# EAGLE board 2021-03-01_HALO_Main_Board_LAYOUT (EAGLE 9.6.2)

Size 91.75 x 44.06 mm. Coordinates in mm from the lower left corner, seen from the top.
Outline: 0,0 91.75,0 91.75,44.06 0,44.06 0,0
Copper layers (1*16): Top 0.035559375mm / dielectric 1.6mm / Bottom 0.035559375mm
Design rules "jlcpcb2layer": minimum track width 5mil, minimum drill 12mil, track to track 5mil, track to pad 5mil, pad to pad 5mil, via to via 5mil, smd to smd 5mil, copper to edge 8mil, drill to drill 6mil, minimum pad ring 5mil, minimum via ring 3mil, stop-mask expansion 2.5mil, vias tented up to drill 0mil, thermal gap 10mil

## Footprints (pad centres in the part's own frame; a part is rotated, then mirrored left to right if it is on the bottom)
C0805 = smd 1.3 x 1.5: 1 -0.95,0; 2 0.95,0
TCP_ROM = smd 1.167 x 1.092: 1 -0.674,0; 2 0.674,0
EIA3216 = smd 1.4 x 1.6: + 1.4,0; - -1.4,0
C0805' = smd 1.3 x 1.5: 1 -0.85,0; 2 0.85,0
CHIP-LED0805 = smd 1.2 x 1.2: A 0,-1.05; C 0,1.05
3,0-PAD-SQUARE = drill 3 pad 5.842 square: B3,0 0,0
QFP50P1200X1200X120-64N = smd 1.475 x 0.3: 1 -5.738,3.75; 2 -5.738,3.25; 3 -5.738,2.75; 4 -5.738,2.25; 5 -5.738,1.75; 6 -5.738,1.25; 7 -5.738,0.75; 8 -5.738,0.25; 9 -5.738,-0.25; 10 -5.738,-0.75; 11 -5.738,-1.25; 12 -5.738,-1.75; 13 -5.738,-2.25; 14 -5.738,-2.75; 15 -5.738,-3.25; 16 -5.738,-3.75; 33 5.738,-3.75; 34 5.738,-3.25; 35 5.738,-2.75; 36 5.738,-2.25; 37 5.738,-1.75; 38 5.738,-1.25; 39 5.738,-0.75; 40 5.738,-0.25; 41 5.738,0.25; 42 5.738,0.75; 43 5.738,1.25; 44 5.738,1.75; 45 5.738,2.25; 46 5.738,2.75; 47 5.738,3.25; 48 5.738,3.75 | smd 0.3 x 1.475: 17 -3.75,-5.738; 18 -3.25,-5.738; 19 -2.75,-5.738; 20 -2.25,-5.738; 21 -1.75,-5.738; 22 -1.25,-5.738; 23 -0.75,-5.738; 24 -0.25,-5.738; 25 0.25,-5.738; 26 0.75,-5.738; 27 1.25,-5.738; 28 1.75,-5.738; 29 2.25,-5.738; 30 2.75,-5.738; 31 3.25,-5.738; 32 3.75,-5.738; 49 3.75,5.738; 50 3.25,5.738; 51 2.75,5.738; 52 2.25,5.738; 53 1.75,5.738; 54 1.25,5.738; 55 0.75,5.738; 56 0.25,5.738; 57 -0.25,5.738; 58 -0.75,5.738; 59 -1.25,5.738; 60 -1.75,5.738; 61 -2.25,5.738; 62 -2.75,5.738; 63 -3.25,5.738; 64 -3.75,5.738
1X05 = drill 1.016 pad 1.88: 1 0,0; 2 2.54,0; 3 5.08,0; 4 7.62,0; 5 10.16,0
1X06 = drill 1.016 pad 1.88: 1 0,0; 2 2.54,0; 3 5.08,0; 4 7.62,0; 5 10.16,0; 6 12.7,0
1X03_LOCK = drill 1.016 pad 1.88: 1 0,0.127; 2 2.54,-0.127; 3 5.08,0.127
1X02 = drill 1.016 pad 1.88: 1 0,0; 2 2.54,0
MICRO_USB = smd 1.38 x 0.45: 1 2.66,1.3; 2 2.66,0.65; 3 2.66,0; 4 2.66,-0.65; 5 2.66,-1.3 | smd 2.1 x 1.475: P1 2.3,-2.462; P2 2.3,2.462 | smd 1.9 x 2.375: P3 0,2.913; P4 0,-2.913 | smd 1.9 x 1.175: P5 0,0.838; P6 0,-0.838
1X04 = drill 1.016 pad 1.88: 1 0,0; 2 2.54,0; 3 5.08,0; 4 7.62,0
MICRO-SD-SOCKET = smd 1.8 x 1.4: CD1 -2.05,0.4; CD2 -7.75,0.4 | smd 0.8 x 1.5: CS -7.84,10.3; DI -6.74,10.7; DO -2.34,10.7; GND -3.44,10.9; RSV1 -8.94,10.7; RSV2 -1.24,10.7; SCLK -4.54,10.7; VCC -5.64,10.9 | smd 1.4 x 1.9: GND1 -13.6,14.55; GND3 -0.45,13.55
SMT-JUMPER_2_NO_NO-SILK = smd 0.635 x 1.27: 1 -0.406,0; 2 0.406,0
R0805 = smd 1.3 x 1.5: 1 -0.95,0; 2 0.95,0
TACTILE_SWITCH_TALL = smd 1.55 x 1.3: A1 -3.975,-2.25; A2 3.975,-2.25; B1 -3.975,2.25; B2 3.975,2.25
SOT360-1_NXP = smd 1.473 x 0.356: 1 -2.921,2.925; 2 -2.921,2.275; 3 -2.921,1.625; 4 -2.921,0.975; 5 -2.921,0.325; 6 -2.921,-0.325; 7 -2.921,-0.975; 8 -2.921,-1.625; 9 -2.921,-2.275; 10 -2.921,-2.925; 11 2.921,-2.925; 12 2.921,-2.275; 13 2.921,-1.625; 14 2.921,-0.975; 15 2.921,-0.325; 16 2.921,0.325; 17 2.921,0.975; 18 2.921,1.625; 19 2.921,2.275; 20 2.921,2.925
PW14 = smd 1.676 x 0.356: 1 -2.819,1.95; 2 -2.819,1.3; 3 -2.819,0.65; 4 -2.819,0; 5 -2.819,-0.65; 6 -2.819,-1.3; 7 -2.819,-1.95; 8 2.819,-1.95; 9 2.819,-1.3; 10 2.819,-0.65; 11 2.819,0; 12 2.819,0.65; 13 2.819,1.3; 14 2.819,1.95
SON_B1-APUR_STM = smd 0.813 x 0.254: 1 -1.473,1; 2 -1.473,0.5; 3 -1.473,0; 4 -1.473,-0.5; 5 -1.473,-1; 6 1.473,-1; 7 1.473,-0.5; 8 1.473,0; 9 1.473,0.5; 10 1.473,1 | smd 1.753 x 2.489: 11 0,0
SOT-23-5_MC_MCH = smd 1.321 x 0.508: 1 -1.295,0.95; 2 -1.295,0; 3 -1.295,-0.95; 4 1.295,-0.95; 5 1.295,0.95
PQFN50P300X300X100-16N = smd 0.53 x 0.35: 1 -1.22,1; 2 -1.22,0.5; 3 -1.22,0; 4 -1.22,-0.5; 5 -1.22,-1; 9 1.22,-1; 10 1.22,-0.5; 11 1.22,0; 12 1.22,0.5; 13 1.22,1 | smd 0.35 x 0.53: 6 -0.5,-1.22; 7 0,-1.22; 8 0.5,-1.22; 14 0.5,1.22; 15 0,1.22; 16 -0.5,1.22
IND_4028_TDK = smd 1.6 x 3.9: 1 -1.45,0; 2 1.45,0
ECX-32 = smd 1.3 x 1.1: 1 -1.15,-0.9; 2 1.15,-0.9; 3 1.15,0.9; 4 -1.15,0.9

## Placement (x,y rotation side)
C1  0.1uF  [C0805]  29.84,38.86 90 bottom
C2  0.1uF  [C0805]  46.23,27.81 225 bottom
C3  0.1uF  [C0805]  43.69,30.35 315 bottom
C4  0.1uF  [C0805]  39.88,26.54 315 bottom
C5  0.1uF  [C0805]  42.42,24 225 bottom
C6  0.1uF  [C0805]  44.96,25.27 225 bottom
C7  4.7uF  [C0805]  31.75,4.45 0 top
C8  4.7uF  [C0805]  29.59,8.26 90 bottom
C9  10uF  [C0805]  22.48,7.75 270 top
C10  22uF  [C0805]  22.35,2.79 90 top
C11  TCP1A106M8R  [TCP_ROM]  53.47,24.51 45 top
C12  0.1uF  [C0805]  48.39,1.4 180 top
C13  10uF  [EIA3216]  44.32,2.79 270 top
C14  30pF  [C0805']  35.31,15.75 180 top
C15  30pF  [C0805']  32.51,19.81 270 top
D1  CHIP-LED0805  [CHIP-LED0805]  78.36,14.73 270 top
D2  CHIP-LED0805  [CHIP-LED0805]  78.36,12.83 270 top
D3  CHIP-LED0805  [CHIP-LED0805]  78.36,10.92 270 top
D4  CHIP-LED0805  [CHIP-LED0805]  78.36,9.02 270 top
D5  CHIP-LED0805  [CHIP-LED0805]  78.36,7.11 270 top
D6  CHIP-LED0805  [CHIP-LED0805]  78.36,5.21 270 top
D7  CHIP-LED0805  [CHIP-LED0805]  78.36,3.3 270 top
D8  CHIP-LED0805  [CHIP-LED0805]  78.36,1.4 270 top
D9  CHIP-LED0805  [CHIP-LED0805]  31.75,2.29 270 top
H1  MOUNT-PAD-SQUARE3.0  [3,0-PAD-SQUARE]  4.06,39.88 0 bottom
H2  MOUNT-PAD-SQUARE3.0  [3,0-PAD-SQUARE]  87.12,40.26 0 bottom
H3  MOUNT-PAD-SQUARE3.0  [3,0-PAD-SQUARE]  4.06,4.06 0 bottom
H4  MOUNT-PAD-SQUARE3.0  [3,0-PAD-SQUARE]  87,4.32 0 bottom
IC1  DSPIC33EP512GM706-I_PT  [QFP50P1200X1200X120-64N]  43.69,26.54 225 top
J1  I2C1  [1X05]  59.94,36.2 0 top
J2  MUX1_I2C0  [1X05]  1.52,24.13 90 top
J4  SPI1  [1X06]  67.82,41.27 0 top
J5  MUX1_I2C1  [1X05]  8.89,24.13 90 top
J6  MUX1_I2C2  [1X05]  1.52,10.16 90 top
J7  MUX1_I2C3  [1X05]  8.89,10.16 90 top
J8  MUX2_I2C0  [1X05]  90.04,24.26 90 top
J9  MUX2_I2C1  [1X05]  82.42,24.26 90 top
J10  MUX2_I2C2  [1X05]  90.04,10.29 90 top
J11  MUX2_I2C3  [1X05]  82.42,10.29 90 top
J12  ICSP  [1X05]  47.88,41.4 180 top
J13  RGB_LED  [1X03_LOCK]  56.37,1.8 90 top
J14  UART1  [1X06]  51.82,41.27 0 top
J15  USB  [1X02]  38.73,1.52 90 top
J16  BATTERY  [1X02]  25.4,6.35 90 top
J17  47346-0001  [MICRO_USB]  31.75,2.54 90 bottom
J18  RGB_LED  [1X03_LOCK]  59.87,15.84 270 top
J19  VREG  [1X02]  12.7,1.52 90 top
J20  [1X04]  67.06,14.86 270 top
J21  [1X04]  70.23,9.27 270 top
J22  RGB_LED  [1X03_LOCK]  59.87,6.84 270 top
J23  RGB_LED  [1X03_LOCK]  63.35,15.84 270 top
J24  RGB_LED  [1X03_LOCK]  63.35,6.84 270 top
J25  RGB_LED  [1X03_LOCK]  56.4,15.84 270 top
J26  MICRO-SD_CARD_SOCKET  [MICRO-SD-SOCKET]  26.29,28.19 0 top
JP1  JUMPER-SMT_2_NO_NO-SILK  [SMT-JUMPER_2_NO_NO-SILK]  20.57,35.69 180 bottom
JP2  JUMPER-SMT_2_NO_NO-SILK  [SMT-JUMPER_2_NO_NO-SILK]  18.92,37.21 180 bottom
JP3  JUMPER-SMT_2_NO_NO-SILK  [SMT-JUMPER_2_NO_NO-SILK]  20.57,38.73 180 bottom
JP4  JUMPER-SMT_2_NO_NO-SILK  [SMT-JUMPER_2_NO_NO-SILK]  18.92,40.13 180 bottom
JP5  JUMPER-SMT_2_NO_NO-SILK  [SMT-JUMPER_2_NO_NO-SILK]  20.57,41.66 180 bottom
R1  470  [R0805]  31.75,33.91 90 bottom
R2  10.0k  [R0805]  33.66,38.73 270 bottom
R3  DNP  [R0805]  18.03,30.48 270 bottom
R4  DNP  [R0805]  18.03,26.42 90 bottom
R5  DNP  [R0805]  20.32,30.48 270 bottom
R6  DNP  [R0805]  20.32,26.42 90 bottom
R7  DNP  [R0805]  22.61,30.48 270 bottom
R8  DNP  [R0805]  22.61,26.42 90 bottom
R9  DNP  [R0805]  58.8,22.61 180 bottom
R10  DNP  [R0805]  62.99,22.61 0 bottom
R11  DNP  [R0805]  58.8,25.15 180 bottom
R12  DNP  [R0805]  62.99,25.15 0 bottom
R13  DNP  [R0805]  58.8,27.69 180 bottom
R14  DNP  [R0805]  62.99,27.69 0 bottom
R15  DNP  [R0805]  44.7,7.49 270 bottom
R16  DNP  [R0805]  44.7,3.43 90 bottom
R17  1.00k  [R0805]  73.79,18.54 0 bottom
R18  1.00k  [R0805]  73.79,16.13 0 bottom
R19  1.00k  [R0805]  73.79,13.72 0 bottom
R20  1.00k  [R0805]  73.79,11.3 0 bottom
R21  1.00k  [R0805]  73.79,8.89 0 bottom
R22  1.00k  [R0805]  73.79,6.48 0 bottom
R23  1.00k  [R0805]  73.79,4.06 0 bottom
R24  1.00k  [R0805]  73.79,1.65 0 bottom
R27  2.2k  [R0805]  67.56,32.51 90 top
R28  2.2k  [R0805]  70.1,32.51 90 top
R29  2.2k  [R0805]  5.08,31.75 0 bottom
R30  2.2k  [R0805]  5.08,34.29 0 bottom
R31  2.2k  [R0805]  12.57,31.62 0 bottom
R32  2.2k  [R0805]  12.7,34.29 0 bottom
R33  2.2k  [R0805]  5.08,17.78 0 bottom
R34  2.2k  [R0805]  5.08,20.32 0 bottom
R35  2.2k  [R0805]  12.7,17.78 0 bottom
R36  2.2k  [R0805]  12.7,20.32 0 bottom
R37  2.2k  [R0805]  86.23,31.88 180 bottom
R38  2.2k  [R0805]  86.23,34.42 180 bottom
R39  2.2k  [R0805]  78.61,31.88 180 bottom
R40  2.2k  [R0805]  78.61,34.42 180 bottom
R41  2.2k  [R0805]  86.23,17.91 180 bottom
R42  2.2k  [R0805]  86.23,20.45 180 bottom
R43  2.2k  [R0805]  78.61,17.91 180 bottom
R44  2.2k  [R0805]  78.61,20.45 180 bottom
R45  470  [R0805]  35.05,3.43 90 top
R46  2.00k  [R0805]  35.94,7.87 270 top
R47  27.0  [R0805]  37.97,8.26 90 bottom
R48  27.0  [R0805]  33.15,8.26 90 bottom
R49  560k  [R0805]  19.05,1.65 0 top
R50  100k  [R0805]  19.05,3.81 180 top
R57  DNP  [R0805]  17.91,3.43 90 bottom
R58  DNP  [R0805]  17.91,7.49 270 bottom
R59  DNP  [R0805]  20.19,3.43 90 bottom
R60  DNP  [R0805]  20.19,7.49 270 bottom
R61  10k  [R0805]  5.08,29.21 0 bottom
R62  10k  [R0805]  12.7,29.21 0 bottom
R63  10k  [R0805]  5.08,15.24 0 bottom
R64  10k  [R0805]  12.7,15.24 0 bottom
R65  10k  [R0805]  86.23,29.34 180 bottom
R66  10k  [R0805]  78.61,29.34 180 bottom
R67  10k  [R0805]  86.23,15.37 180 bottom
R68  10k  [R0805]  78.61,15.37 180 bottom
R69  10k  [R0805]  47.88,8.51 0 bottom
R70  1M  [R0805]  30.73,16.38 315 top
S1  SWITCH-MOMENTARY-2SMD-4  [TACTILE_SWITCH_TALL]  31.75,36.45 270 top
U1  PCA9544APW  [SOT360-1_NXP]  20.57,19.18 180 bottom
U2  PCA9544APW  [SOT360-1_NXP]  70.36,25.15 90 bottom
U3  TXB0104PWR  [PW14]  19.68,38.61 180 bottom
U4  STBB1-APUR  [SON_B1-APUR_STM]  19.05,7.62 180 top
U5  MCP73831T-2ACI/OT  [SOT-23-5_MC_MCH]  31.75,7.62 270 top
U8  H3LIS200DLTR  [PQFN50P300X300X100-16N]  48.01,5.71 180 top
U$1  2.2uH  [IND_4028_TDK]  13.59,9.02 90 top
U$3  ECS-240-20-33-TR  [ECX-32]  35.69,19.81 90 top

## Library data of the parts
C1-C10 C12 R1-R24 R27-R50 R57-R70 = rcl
C11 = HALO_Tant_Cap_Library; BUILT_BY: EMA_UL_Team; MANUFACTURER_PART_NUMBER: TCP1A106M8R; SOURCELIBRARY: Rohm_2014-12-31; VENDOR: ROHM Semiconductor
C13 = SparkFun-Capacitors; PROD_ID: CAP-00811
C14 C15 = adafruit
D1-D9 = UA_NASA_RMC-Diodes
H1-H4 = holes
IC1 = SamacSys_Parts; ARROW_PART_NUMBER: DSPIC33EP512GM706-I/PT; ARROW_PRICE-STOCK: https://www.arrow.com/en/products/dspic33ep512gm706-ipt/microchip-technology; DESCRIPTION: Microchip DSPIC33EP512GM706-I/PT, 16bit dsPIC Microcontroller, 60MHz, 512 kB Flash, 64-Pin TQFP; HEIGHT: 1.2mm; MANUFACTURER_NAME: Microchip; MANUFACTURER_PART_NUMBER: DSPIC33EP512GM706-I/PT; MOUSER_PART_NUMBER: 579-512GM706-I/PT; MOUSER_PRICE-STOCK: https://www.mouser.com/Search/Refine.aspx?Keyword=579-512GM706-I%2FPT
J1 J2 J5-J13 J15 J16 J18 J19 J22-J25 = SparkFun-Connectors
J4 J14 = SparkFun-Connectors; PROD_ID: CONN-08437
J17 = tinycircuits; PARTNO: AS-ITM-00021; PNPROTATION: 90
J20 J21 = SparkFun-Connectors; PROD_ID: CONN-09696
J26 = SparkFun-Connectors; PROD_ID: CONN-07820; SF_ID: PRT-00127
JP1-JP5 = SparkFun-Jumpers
S1 = UA_NASA_RMC-Switches; PROD_ID: SWCH-11966
U1 U2 = I2C_Multiplexer; BUILT_BY: EMA_UL_Team; MANUFACTURER_PART_NUMBER: PCA9544APW; SOURCELIBRARY: NXP_2011-11-10; VENDOR: NXP
U3 = Level_Shifter_TXB0104PWR; DATASHEET_URL: http://www.ti.com/lit/gpn/TXB0104; DESCRIPTION: 4-Bit Bidirectional Voltage-Level Translator with Auto Direction Sensing and +/-15 kV ESD Protect; FAMILY_NAME: AUTO DIRECTION SENSING DUAL SUPPLY TRANSLATOR; GENERIC_PART_NUMBER: TXB0104; INDUSTRY_STD_PKG_TYPE: TSSOP; MANUFACTURER: Texas Instruments; MANUFACTURER_PART_NUMBER: TXB0104PWR; PACKAGE_DESIGNATOR: PW; PIN_COUNT: 14; VENDOR: Texas Instruments
U4 = HALO_Buck_Boost; BUILT_BY: EMA_Matt; DATASHEET: https://datasheet.octopart.com/STBB1-APUR-STMicroelectronics-datasheet-10837531.pdf; MANUFACTURER_PART_NUMBER: STBB1-APUR; SOURCELIBRARY: Updates_to_database_2020-11-13; VENDOR: STMicroelectronics
U5 = HALO_Batt_Charger; BUILT_BY: EMA_UL_Team; MANUFACTURER_PART_NUMBER: MCP73831T-2ACI/OT; SOURCELIBRARY: Microchip_2011-05-13; VENDOR: Microchip
U8 = H3LIS200DLTR; DESCRIPTION: Accelerometer X, Y, Z Axis ±100g, ±200g 25Hz ~ 500Hz 16-TFLGA (3x3); DIGI-KEY_PART_NUMBER: 497-15698-1-ND; MF: STMicroelectronics; MP: H3LIS200DLTR; PACKAGE: TFLGA-16 STMicroelectronics; PURCHASE-URL: https://pricing.snapeda.com/search/part/H3LIS200DLTR/?ref=eda
U$1 = HALO_L_Buck_Boost
U$3 = UA_NASA_RMC-Oscillators

## Nets
!MCLR: IC1.7 J12.1 R1.1
!MUX1_INT0: J2.3 R61.2 U1.4
!MUX1_INT1: J5.3 R62.2 U1.7
!MUX1_INT2: J6.3 R63.2 U1.11
!MUX1_INT3: J7.3 R64.2 U1.14
!MUX2_INT0: J8.3 R65.2 U2.4
!MUX2_INT1: J9.3 R66.2 U2.7
!MUX2_INT2: J10.3 R67.2 U2.11
!MUX2_INT3: J11.3 R68.2 U2.14 U8.11
!RGB1_EN: IC1.4 J25.1
!RGB2_EN: IC1.5 J25.2
!RGB3_EN: IC1.6 J25.3
!SS: IC1.15 J4.3 JP1.2 U3.13
!U1RTS: IC1.23 J14.6
+3V3: C2.1 C3.1 C4.1 C5.1 C6.1 C10.1 C12.1 C13.+ IC1.10 IC1.19 IC1.26 IC1.38 IC1.57 J1.1 J2.1 J4.1 J5.1 J6.1 J7.1 J8.1 J9.1 J10.1 J11.1 J12.2 J13.2 J14.3 J19.2 J26.VCC R2.1 R3.1 R5.1 R7.1 R9.1 R11.1 R13.1 R15.1 R27.1 R28.1 R29.1 R30.1 R31.1 R32.1 R33.1 R34.1 R35.1 R36.1 R37.1 R38.1 R39.1 R40.1 R41.1 R42.1 R43.1 R44.1 R49.2 R61.1 R62.1 R63.1 R64.1 R65.1 R66.1 R67.1 R68.1 R69.2 U1.20 U2.20 U3.1 U3.14 U4.1 U8.1 U8.14 U8.15
ACCEL_A0: R15.2 R16.2 U8.7
ACCEL_INT2: U8.9
BB_EN: R57.2 R58.2 U4.6
BB_M/S: R59.2 R60.2 U4.7
CD: IC1.16 JP5.2 U3.9
GND: C1.2 C2.2 C3.2 C4.2 C5.2 C6.2 C7.2 C8.2 C9.2 C10.2 C11.2 C12.2 C13.- C14.2 C15.2 D1.C D2.C D3.C D4.C D5.C D6.C D7.C D8.C H1.B3,0 H2.B3,0 H3.B3,0 H4.B3,0 IC1.9 IC1.20 IC1.25 IC1.41 J1.2 J2.2 J4.2 J5.2 J6.2 J7.2 J8.2 J9.2 J10.2 J11.2 J12.3 J13.1 J14.1 J15.1 J16.1 J17.5 J17.P1 J17.P2 J17.P3 J17.P4 J17.P5 J17.P6 J19.1 J26.GND J26.GND1 J26.GND3 R4.1 R6.1 R8.1 R10.1 R12.1 R14.1 R16.1 R46.1 R50.1 R58.1 R60.1 S1.A2 U1.10 U2.10 U3.7 U4.3 U4.9 U4.11 U5.2 U8.5 U8.10 U8.12 U8.13 U8.16 U$3.2 U$3.4
I2C_MUX1_A0: R3.2 R4.2 U1.1
I2C_MUX1_A1: R5.2 R6.2 U1.2
I2C_MUX1_A2: R7.2 R8.2 U1.3
I2C_MUX2_A0: R9.2 R10.2 U2.1
I2C_MUX2_A1: R11.2 R12.2 U2.2
I2C_MUX2_A2: R13.2 R14.2 U2.3
INT: J1.3
LED1: IC1.42 J20.1 R17.2
LED2: IC1.43 J20.2 R18.2
LED3: IC1.44 J20.3 R19.2
LED4: IC1.49 J20.4 R20.2
LED5: IC1.53 J21.1 R21.2
LED6: IC1.54 J21.2 R22.2
LED7: IC1.58 J21.3 R23.2
LED8: IC1.59 J21.4 R24.2
MISO: IC1.34 J4.6 JP4.2 U3.10
MOSI: IC1.33 J4.5 JP3.2 U3.11
MUX1_SC0: J2.5 R30.2 U1.6
MUX1_SC1: J5.5 R32.2 U1.9
MUX1_SC2: J6.5 R34.2 U1.13
MUX1_SC3: J7.5 R36.2 U1.16
MUX1_SD0: J2.4 R29.2 U1.5
MUX1_SD1: J5.4 R31.2 U1.8
MUX1_SD2: J6.4 R33.2 U1.12
MUX1_SD3: J7.4 R35.2 U1.15
MUX2_SC0: J8.5 R38.2 U2.6
MUX2_SC1: J9.5 R40.2 U2.9
MUX2_SC2: J10.5 R42.2 U2.13
MUX2_SC3: J11.5 R44.2 U2.16 U8.4
MUX2_SD0: J8.4 R37.2 U2.5
MUX2_SD1: J9.4 R39.2 U2.8
MUX2_SD2: J10.4 R41.2 U2.12
MUX2_SD3: J11.4 R43.2 U2.15 U8.6
N$1: C1.1 R1.2 R2.2 S1.B2
N$2: R69.1 U8.8
N$5: D1.A R17.1
N$6: J17.2 R47.1
N$7: D2.A R18.1
N$8: D9.C R45.1
N$9: R49.1 R50.2 U4.10
N$10: D3.A R19.1
N$11: D4.A R20.1
N$12: D5.A R21.1
N$13: D6.A R22.1
N$14: D7.A R23.1
N$15: D8.A R24.1
N$16: R45.2 U5.1
N$17: J17.3 R48.1
N$18: U4.4 U$1.2
N$19: R46.2 U5.5
N$20: U4.2 U$1.1
N$25: U2.17
OSC1: C15.1 IC1.39 R70.1 U$3.3
OSC2: C14.1 IC1.40 R70.2 U$3.1
PGEC1: IC1.17 J12.5
PGED1: IC1.18 J12.4
PWM1H: IC1.2 J23.1
PWM1L: IC1.3 J18.1
PWM2H: IC1.62 J23.2
PWM2L: IC1.63 J18.2
PWM3H: IC1.60 J23.3
PWM3L: IC1.61 J18.3
PWM4H: IC1.64 J24.1
PWM4L: IC1.1 J22.1
PWM5H: IC1.52 J24.2
PWM5L: IC1.55 J22.2
PWM6H: IC1.50 J24.3
PWM6L: IC1.51 J22.3
RGB_DIN: IC1.11 J13.3
SCK: IC1.35 J4.4 JP2.2 U3.12
SCL1: IC1.37 J1.5 R28.2 U1.18 U2.18
SD_!SS: J26.CS JP1.1 U3.2
SD_CD: J26.CD1 JP5.1 U3.6
SD_MISO: J26.DO JP4.1 U3.5
SD_MOSI: J26.DI JP3.1 U3.4
SD_SCK: J26.SCLK JP2.1 U3.3
SDA1: IC1.36 J1.4 R27.2 U1.19 U2.19
U1CTS: IC1.24 J14.2
U1RX: IC1.22 J14.4
U1TX: IC1.21 J14.5
USBDM: R47.2
USBDP: R48.2
V_BATT: C8.1 J16.2 U5.3
VBATT: C9.1 R57.1 R59.1 U4.5 U4.8
VCAP: C11.1 IC1.56
VCC_USB: C7.1 D9.A J15.2 J17.1 U5.4

## Tracks (layer width: path | path; a pad name or v marks a point on that pad's centre or on a via)
!MCLR  (2 unrouted)
!MUX1_INT0  (2 unrouted)
!MUX1_INT1  (2 unrouted)
!MUX1_INT2  (2 unrouted)
!MUX1_INT3  (2 unrouted)
!MUX2_INT0  (2 unrouted)
!MUX2_INT1  (2 unrouted)
!MUX2_INT2  (2 unrouted)
!MUX2_INT3  (3 unrouted)
!RGB1_EN  (1 unrouted)
!RGB2_EN  (1 unrouted)
!RGB3_EN  (1 unrouted)
!SS  (3 unrouted)
!U1RTS  (1 unrouted)
+3V3  (71 unrouted)
ACCEL_A0  (2 unrouted)
BB_EN  (2 unrouted)
BB_M/S  (2 unrouted)
CD  (2 unrouted)
GND  (82 unrouted)
I2C_MUX1_A0  (2 unrouted)
I2C_MUX1_A1  (2 unrouted)
I2C_MUX1_A2  (2 unrouted)
I2C_MUX2_A0  (2 unrouted)
I2C_MUX2_A1  (2 unrouted)
I2C_MUX2_A2  (2 unrouted)
LED1  (2 unrouted)
LED2  (2 unrouted)
LED3  (2 unrouted)
LED4  (2 unrouted)
LED5  (2 unrouted)
LED6  (2 unrouted)
LED7  (2 unrouted)
LED8  (2 unrouted)
MISO  (3 unrouted)
MOSI  (3 unrouted)
MUX1_SC0  (2 unrouted)
MUX1_SC1  (2 unrouted)
MUX1_SC2  (2 unrouted)
MUX1_SC3  (2 unrouted)
MUX1_SD0  (2 unrouted)
MUX1_SD1  (2 unrouted)
MUX1_SD2  (2 unrouted)
MUX1_SD3  (2 unrouted)
MUX2_SC0  (2 unrouted)
MUX2_SC1  (2 unrouted)
MUX2_SC2  (2 unrouted)
MUX2_SC3  (3 unrouted)
MUX2_SD0  (2 unrouted)
MUX2_SD1  (2 unrouted)
MUX2_SD2  (2 unrouted)
MUX2_SD3  (3 unrouted)
N$1  (3 unrouted)
N$2  (1 unrouted)
N$5  (1 unrouted)
N$6  (1 unrouted)
N$7  (1 unrouted)
N$8  (1 unrouted)
N$9  (2 unrouted)
N$10  (1 unrouted)
N$11  (1 unrouted)
N$12  (1 unrouted)
N$13  (1 unrouted)
N$14  (1 unrouted)
N$15  (1 unrouted)
N$16  (1 unrouted)
N$17  (1 unrouted)
N$18  (1 unrouted)
N$19  (1 unrouted)
N$20  (1 unrouted)
OSC1  (3 unrouted)
OSC2  (3 unrouted)
PGEC1  (1 unrouted)
PGED1  (1 unrouted)
PWM1H  (1 unrouted)
PWM1L  (1 unrouted)
PWM2H  (1 unrouted)
PWM2L  (1 unrouted)
PWM3H  (1 unrouted)
PWM3L  (1 unrouted)
PWM4H  (1 unrouted)
PWM4L  (1 unrouted)
PWM5H  (1 unrouted)
PWM5L  (1 unrouted)
PWM6H  (1 unrouted)
PWM6L  (1 unrouted)
RGB_DIN  (1 unrouted)
SCK  (3 unrouted)
SCL1  (4 unrouted)
SD_!SS  (2 unrouted)
SD_CD  (2 unrouted)
SD_MISO  (2 unrouted)
SD_MOSI  (2 unrouted)
SD_SCK  (2 unrouted)
SDA1  (4 unrouted)
U1CTS  (1 unrouted)
U1RX  (1 unrouted)
U1TX  (1 unrouted)
V_BATT  (2 unrouted)
VBATT  (4 unrouted)
VCAP  (1 unrouted)
VCC_USB  (4 unrouted)

## Text on the board
tNames: V | !RESET | V | V | V | | | UART | SPI_1 | I2C_1 | P1 | P0 | P0 | P1 | EXT. OSC. | H.A.L.O. Main Board / Hunter Hykes / 2021/03/02 | RGB | ACCEL. | Buck/Boost | Charger | P3 | P2 | P2 | Y | + / - | P3 | BATT | X | + / - | + / - | + / -
bNames: MUX_2 | A2 | A0 | A1 | A2 | A1 | A0 | MUX_1 | Buck/Boost | Charger | (;